# EAGLE board star-tracker-camera-board (EAGLE 9.6.2)
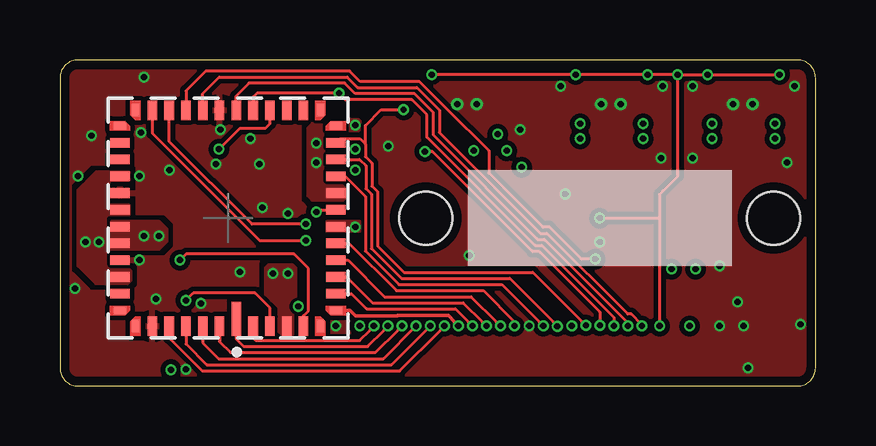
[diagram p0: board, top side]
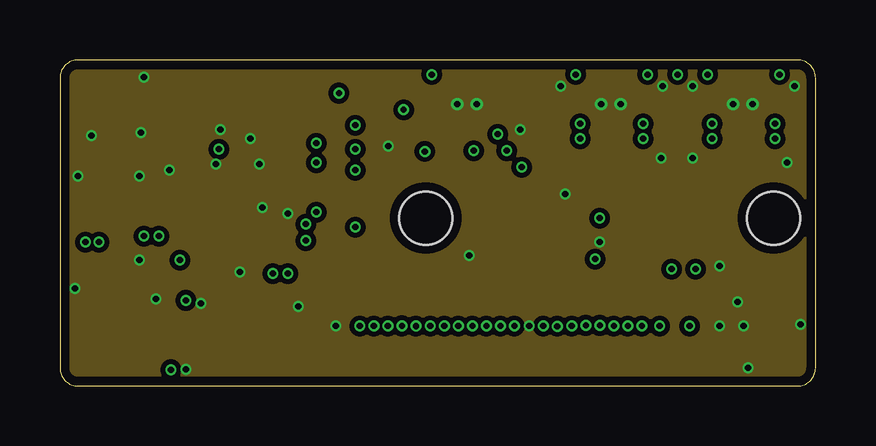
[diagram p1: board, inner layer Route2]
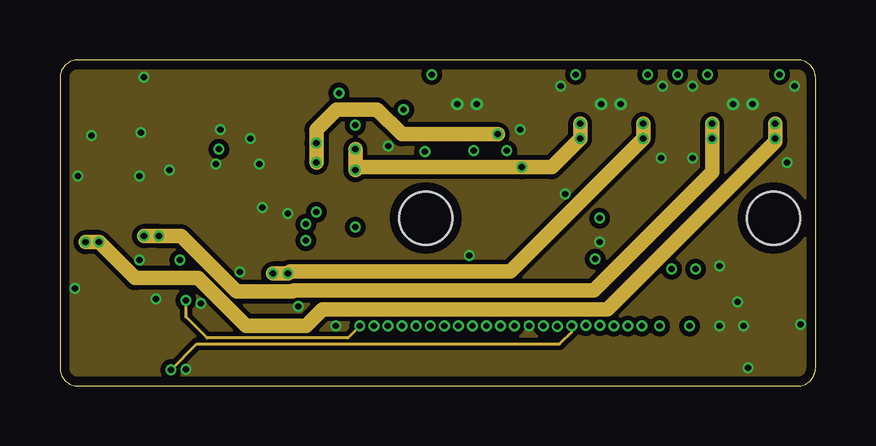
[diagram p2: board, inner layer Route15]
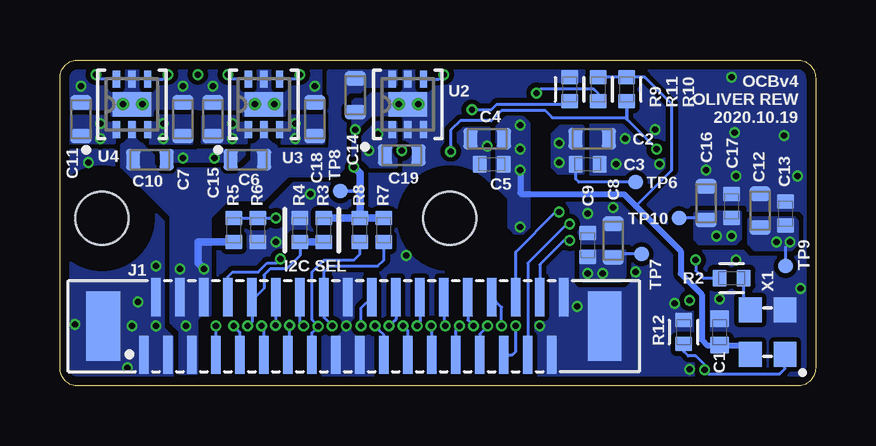
[diagram p3: board, bottom side, seen from below]

Size 31.5 x 13.6 mm. Coordinates in mm from the lower left corner, seen from the top.
Outline: 30.75,13.6 0.75,13.6 arc90 0,12.85 0,0.75 arc90 0.75,0 30.75,0 arc90 31.5,0.75 31.5,12.85 arc90 30.75,13.6
Copper layers (1*2*15*16): Top 0.035559375mm / dielectric 0.17018125mm / Route2 0.01778125mm / dielectric 47mil / Route15 0.01778125mm / dielectric 0.17018125mm / Bottom 0.035559375mm
Design rules "oshpark-4layer *": minimum track width 5mil, minimum drill 10mil, track to track 5mil, track to pad 5mil, pad to pad 5mil, via to via 5mil, smd to smd 5mil, copper to edge 15mil, drill to drill 6mil, minimum pad ring 4mil, minimum via ring 4mil, stop-mask expansion 1.5mil, vias tented up to drill 10mil, thermal gap 10mil
Holes 2.2 mm at 15.25,7 29.75,7
bRestrict: area 13.8,5.5 to 16.8,8.5; area 28.2,5.5 to 31.2,8.5

## Footprints (pad centres in the part's own frame; a part is rotated, then mirrored left to right if it is on the bottom)
.0402-A-NOSILK = smd 0.7 x 0.8: 1 -0.55,0; 2 0.55,0
.0603-C-NOSILK = smd 0.6 x 0.9: 1 -0.7,0; 2 0.7,0
.0402-B-NOSILK = smd 0.6 x 0.7: 1 -0.5,0; 2 0.5,0
TE_3-1734742-6 = smd 0.4 x 1.6: 1 -9.75,-1.2; 2 -9.25,1.2; 3 -8.75,-1.2; 4 -8.25,1.2; 5 -7.75,-1.2; 6 -7.25,1.2; 7 -6.75,-1.2; 8 -6.25,1.2; 9 -5.75,-1.2; 10 -5.25,1.2; 11 -4.75,-1.2; 12 -4.25,1.2; 13 -3.75,-1.2; 14 -3.25,1.2; 15 -2.75,-1.2; 16 -2.25,1.2; 17 -1.75,-1.2; 18 -1.25,1.2; 19 -0.75,-1.2; 20 -0.25,1.2; 21 0.25,-1.2; 22 0.75,1.2; 23 1.25,-1.2; 24 1.75,1.2; 25 2.25,-1.2; 26 2.75,1.2; 27 3.25,-1.2; 28 3.75,1.2; 29 4.25,-1.2; 30 4.75,1.2; 31 5.25,-1.2; 32 5.75,1.2; 33 6.25,-1.2; 34 6.75,1.2; 35 7.25,-1.2; 36 7.75,1.2 | smd 1.4 x 2.9: S1 -11.45,0; S2 9.45,0
.0402-B = smd 0.6 x 0.7: 1 -0.5,0; 2 0.5,0
TP06R = smd 0.6 x 0.6: TP 0,0
AR0134CSSM00SPCA0 = smd 0.4 x 1.4: 1 -0.35,4.2 | smd 0.4 x 0.8: 2 -1.05,4.5; 3 -1.75,4.5; 4 -2.45,4.5; 5 -3.15,4.5; 20 -3.15,-4.5; 21 -2.45,-4.5; 22 -1.75,-4.5; 23 -1.05,-4.5; 24 -0.35,-4.5; 25 0.35,-4.5; 26 1.05,-4.5; 27 1.75,-4.5; 28 2.45,-4.5; 29 3.15,-4.5; 44 3.15,4.5; 45 2.45,4.5; 46 1.75,4.5; 47 1.05,4.5; 48 0.35,4.5 | smd 0.3 x 0.5: 6 -3.85,4.5; 19 -3.85,-4.5; 30 3.85,-4.5; 43 3.85,4.5 | smd 0.5 x 0.3: 7 -4.5,3.85; 18 -4.5,-3.85; 31 4.5,-3.85; 42 4.5,3.85 | smd 0.8 x 0.4: 8 -4.5,3.15; 9 -4.5,2.45; 10 -4.5,1.75; 11 -4.5,1.05; 12 -4.5,0.35; 13 -4.5,-0.35; 14 -4.5,-1.05; 15 -4.5,-1.75; 16 -4.5,-2.45; 17 -4.5,-3.15; 32 4.5,-3.15; 33 4.5,-2.45; 34 4.5,-1.75; 35 4.5,-1.05; 36 4.5,-0.35; 37 4.5,0.35; 38 4.5,1.05; 39 4.5,1.75; 40 4.5,2.45; 41 4.5,3.15
DRV6_1P6X1 = smd 0.7 x 0.3: 1 -1.05,0.65; 2 -1.05,0; 3 -1.05,-0.65; 4 1.05,-0.65; 5 1.05,0; 6 1.05,0.65 | smd 1.016 x 1.6: 7 0,0 | drill 0.254 pad 0.508: 8 0,0.375; 9 0,-0.438
OSC_KYOCERA_KC2520B = smd 1.05 x 0.95: 1 -0.925,-0.725; 2 0.925,-0.725; 3 0.925,0.725; 4 -0.925,0.725

## Placement (x,y rotation side)
C1  10nF  [.0402-A-NOSILK]  4,2.25 270 bottom
C2  10uF  [.0603-C-NOSILK]  9.31,10.31 0 bottom
C3  0.1uF  [.0402-B-NOSILK]  9.5,9.25 0 bottom
C4  10uF  [.0603-C-NOSILK]  13.69,10.31 180 bottom
C5  0.1uF  [.0402-B-NOSILK]  13.5,9.25 180 bottom
C6  1.0uF  [.0603-C-NOSILK]  23.69,9.44 180 bottom
C7  2.2uF  [.0603-C-NOSILK]  26.38,11.12 90 bottom
C8  10uF  [.0603-C-NOSILK]  8.44,6.06 90 bottom
C9  0.1uF  [.0402-B-NOSILK]  9.5,5.88 90 bottom
C10  1.0uF  [.0603-C-NOSILK]  27.75,9.44 0 bottom
C11  2.2uF  [.0603-C-NOSILK]  30.62,11.12 90 bottom
C12  10uF  [.0603-C-NOSILK]  2.31,7.31 90 bottom
C13  0.1uF  [.0402-B-NOSILK]  1.25,7.19 90 bottom
C14  1.0uF  [.0603-C-NOSILK]  19.19,12.12 270 bottom
C15  2.2uF  [.0603-C-NOSILK]  25.12,11.12 90 bottom
C16  10uF  [.0603-C-NOSILK]  4.56,7.62 90 bottom
C17  0.1uF  [.0402-B-NOSILK]  3.5,7.5 90 bottom
C18  2.2uF  [.0603-C-NOSILK]  20.88,11.12 90 bottom
C19  2.2uF  [.0603-C-NOSILK]  17.25,9.62 0 bottom
J1  3-1734742-6  [TE_3-1734742-6]  18.25,2.5 0 bottom
R2  100  [.0402-B]  3.5,4.5 180 bottom
R3  DNP  [.0402-B-NOSILK]  20.5,6.5 90 bottom
R4  10k  [.0402-B-NOSILK]  21.5,6.5 270 bottom
R5  10k  [.0402-B-NOSILK]  24.25,6.5 90 bottom
R6  DNP  [.0402-B-NOSILK]  23.25,6.5 270 bottom
R7  4.7k  [.0402-B-NOSILK]  18,6.5 90 bottom
R8  4.7k  [.0402-B-NOSILK]  19,6.5 90 bottom
R9  10k  [.0402-B]  10.25,12.38 270 bottom
R10  10k  [.0402-B]  7.88,12.38 90 bottom
R11  10k  [.0402-B]  9.06,12.38 90 bottom
R12  10k  [.0402-B]  5.5,2.25 270 bottom
TP6  TPTP06R  [TP06R]  7.5,8.5 0 bottom
TP7  TPTP06R  [TP06R]  7.25,5.5 0 bottom
TP8  TPTP06R  [TP06R]  19.81,8.12 0 bottom
TP9  TPTP06R  [TP06R]  1.25,5 0 bottom
TP10  TPTP06R  [TP06R]  5.69,7 0 bottom
U1  AR0134CSSM00SPCA0  [AR0134CSSM00SPCA0]  7,7 180 top
U2  TPS70618DRVR  [DRV6_1P6X1]  17,11.75 90 bottom
U3  TPS71928-28DRVT  [DRV6_1P6X1]  23,11.75 90 bottom
U4  TPS71928-28DRVT  [DRV6_1P6X1]  28.5,11.75 90 bottom
X1  KC2520B27.0000C10E00  [OSC_KYOCERA_KC2520B]  2,2.25 90 bottom

## Library data of the parts
C1-C19 R2-R12 = oresat-rcl
J1 = J-TEConnectivity-3-1734742-6 ; DPN: A100241CT-ND; MPN: 3-1734742-6
TP6-TP10 = J-TestPoint-Small
U1 = U-ONSemi-AR0134
U2 = U-TI-TPS70618-VoltageReg; DPN: 296-48768-1-ND; MPN: TPS70618DRVR; VENDOR: Texas Instruments
U3 U4 = U-TI-TPS71928-28-VoltageReg; DPN: 296-21660-1-ND; MPN: TPS71928-28DRVR; VENDOR: Texas Instruments
X1 = X-KYOCERA-KC2520B27; DPN: 478-4781-1-ND; MPN: KC2520B27.0000C10E00; VENDOR: Kyocera

## Nets
3.3V: C6.1 C10.1 C14.1 J1.4 J1.5 J1.6 R5.1 U2.6 U3.2 U4.2
!OE: J1.11 R11.1 U1.23
!RESET: J1.13 R9.2 U1.17
CLK_EN: J1.14 R12.2 X1.1
D0: J1.25 U1.45
D1: J1.26 U1.46
D2: J1.27 U1.47
D3: J1.28 U1.48
D4: J1.29 U1.1
D5: J1.30 U1.2
D6: J1.31 U1.3
D7: J1.24 U1.7
D8: J1.23 U1.8
D9: J1.22 U1.9
D10: J1.21 U1.10
D11: J1.20 U1.11
FLASH: J1.9 U1.26
GND: C1.1 C2.2 C3.2 C4.2 C5.2 C6.2 C7.2 C8.2 C9.2 C10.2 C11.2 C12.2 C13.2 C14.2 C15.2 C16.2 C17.2 C18.2 C19.2 J1.1 J1.2 J1.3 J1.17 J1.18 J1.19 J1.35 J1.36 J1.S1 J1.S2 R4.1 R6.2 R9.1 R12.1 U1.6 U1.25 U1.30 U1.35 U1.39 U1.44 U2.2 U2.3 U2.5 U2.7 U2.8 U2.9 U3.5 U3.7 U3.8 U3.9 U4.5 U4.7 U4.8 U4.9 X1.2
HSYNC: J1.34 U1.29
N$1: R2.1 X1.3
N$2: R2.2 U1.5
PIXCLK: J1.32 U1.13
SADDR: J1.10 R3.1 R4.2 U1.24
SCLK: J1.16 R7.1 U1.15
SDATA: J1.15 R8.1 U1.16
STANDBY: J1.12 R10.1 U1.22
TRIGGER: J1.8 U1.27
VAA: C11.1 C12.1 C13.1 TP9.TP U1.34 U1.36 U1.40 U4.1
VAA_PIX: C7.1 C16.1 C17.1 TP10.TP U1.37 U1.38 U4.3
VDD: C2.1 C3.1 C19.1 TP6.TP U1.14 U1.19 U2.1
VDD_IO: C1.2 C4.1 C5.1 C18.1 R3.2 R7.2 R8.2 R10.2 R11.2 TP8.TP U1.12 U1.18 U3.3 X1.4
VDD_PLL: C8.1 C9.1 C15.1 TP7.TP U1.4 U3.1
VREG_EN: J1.7 R5.2 R6.1 U2.4 U3.4 U3.6 U4.4 U4.6
VSYNC: J1.33 U1.28

## Tracks (layer width: path | path; a pad name or v marks a point on that pad's centre or on a via)
3.3V  (via drill 0.25)
  Bottom 0.305: R5.1 25.75,6 25.75,5.12 v25.5,4.88
  other vias: 26.25,2.5 26.5,4.88
  pour Bottom (rank 2, no thermals): 28.94,10.06 28.94,9.31 28.06,9.31 28.06,10.06 28.12,10.06 28.38,10.31 28.38,11 28.62,11 28.62,10.31 28.88,10.06
  pour Bottom (rank 2, no thermals): 23.44,10.06 23.44,9.31 22.56,9.31 22.56,10.06 22.62,10.06 22.88,10.31 22.88,11 23.12,11 23.12,10.31 23.38,10.06
  pour Bottom (no thermals): 25.25,4.5 25.25,2.94 25.62,2.94 25.75,2.81 25.81,2.75 25.81,2.06 25.81,0.5 26.5,0.5 26.5,2.25 26.75,2.5 26.88,2.62 26.88,3.44 26.88,5.25 26.5,5.25 25.25,5.25
  pour Bottom (rank 3, no thermals): 26.88,5.25 26.88,7.06 28.94,9.12 28.94,10.06 28.06,10.06 27.62,9.62 27.62,9.25 27.44,9.06 23.88,9.06 23.5,9.44 23.5,10.06 22.56,10.06 22.44,9.94 20.44,9.94 20.31,10.06 20.31,13.12 20.19,13.25 18.81,13.25 18.69,13.12 18.69,12.56 19,12.25 19.44,12.25 19.62,12.06 19.62,9.12 20,8.75 22,8.75 23,7.75 24.5,7.75 25.25,7 25.25,5.25
  pour Bottom (no thermals): 17.56,12.5 19.62,12.5 19.69,12.56 19.69,13.12 19.56,13.25 17.56,13.25 17.5,13.19 17.5,12.56
!OE  (via drill 0.25)
  Top 0.127: v23.09,2.5 23.09,2.86 20.09,5.86 19.81,5.86 15.29,10.38 15.29,11.32 14.67,11.94 11.9,11.94 v11.63,12.21 8.21,12.21 8.05,12.05 U1.23
  Bottom 0.127: J1.11 23,2.41 v23.09,2.5 | R11.1 9.06,12.19 9.25,12.38 11.47,12.38 v11.63,12.21
!RESET  (via drill 0.25)
  Top 0.127: U1.17 11.66,10.31 12.5,10.31 12.73,10.08 | 12.73,10.08 12.73,9.56 13,9.29 13,8.34 13.24,8.1 13.24,5.84 14.34,4.74 19.71,4.74 21.75,2.7 21.75,2.69 v21.92,2.53 | 12.73,10.08 12.73,10.87 13.39,11.52 v14.33,11.52
  Bottom 0.127: J1.13 21.92,1.38 v21.92,2.53 | v14.33,11.52 13.52,11.52 13.29,11.75 10.38,11.75 R9.2
CLK_EN  (via drill 0.25)
  Route15 0.127: v4.62,0.67 5.7,1.75 20.83,1.75 21.34,2.25 v21.34,2.5
  Bottom 0.127: X1.1 1.27,0.72 1.49,0.51 4.46,0.51 v4.62,0.67 4.62,0.88 5,1.25 5.31,1.25 5.5,1.44 R12.2 | v21.34,2.5 21.5,2.67 J1.14
D0  (via drill 0.25)
  Top 0.127: U1.45 4.55,2.01 5.93,0.63 14.16,0.63 15.86,2.33 v16.02,2.5
  Bottom 0.127: J1.25 16,2.48 v16.02,2.5
D1  (via drill 0.25)
  Top 0.127: U1.46 5.25,1.75 6.12,0.88 13.82,0.88 v15.44,2.5
  Bottom 0.127: J1.26 15.5,2.56 v15.44,2.5
D2  (via drill 0.25)
  Top 0.127: U1.47 5.95,1.8 6.61,1.14 13.48,1.14 v14.84,2.5
  Bottom 0.127: J1.27 15,2.34 v14.84,2.5
D3  (via drill 0.25)
  Top 0.127: U1.48 6.65,1.85 7.11,1.39 13.15,1.39 14.09,2.33 14.09,2.34 v14.26,2.51
  Bottom 0.127: J1.28 14.5,2.75 v14.26,2.51
D4  (via drill 0.25)
  Top 0.127: U1.1 7.35,1.96 7.67,1.65 12.82,1.65 13.5,2.33 v13.67,2.5
  Bottom 0.127: v13.67,2.5 14,2.17 J1.29
D5  (via drill 0.25)
  Top 0.127: U1.2 8.05,2.01 8.16,1.9 12.49,1.9 12.92,2.33 v13.08,2.5
  Bottom 0.127: v13.08,2.5 13.08,3.28 J1.30
D6  (via drill 0.25)
  Top 0.127: U1.3 8.75,3.25 8.12,3.88 5.56,3.88 v5.25,3.57
  Route15 0.127: v12.5,2.5 12,2 6.13,2 5.25,2.88 v5.25,3.57
  Bottom 0.127: J1.31 12.64,1.3 12.5,1.44 v12.5,2.5
D7  (via drill 0.25)
  Top 0.152: U1.7 12.1,3.15 12.32,2.93 14.07,2.93 14.08,2.94 16.2,2.94 16.45,2.68 16.45,2.65 v16.61,2.5
  Bottom 0.127: J1.24 16.5,2.61 v16.61,2.5
D8  (via drill 0.25)
  Top 0.127: U1.8 12.15,3.85 12.78,3.22 16.48,3.22 17.02,2.67 v17.19,2.5
  Bottom 0.127: J1.23 17,2.3 17.02,2.33 v17.19,2.5
D9  (via drill 0.25)
  Top 0.127: U1.9 11.95,4.55 13.03,3.47 16.81,3.47 17.61,2.67 v17.77,2.5
  Bottom 0.127: J1.22 17.5,2.78 17.61,2.67 v17.77,2.5
D10  (via drill 0.25)
  Top 0.127: U1.10 12,5.25 13.53,3.72 17.14,3.72 18.19,2.67 v18.36,2.5
  Bottom 0.127: J1.21 18,2.13 18.19,2.33 v18.36,2.5
D11  (via drill 0.25)
  Top 0.127: U1.11 12.05,5.95 14.02,3.98 17.65,3.98 18.94,2.68 v18.94,2.5
  Bottom 0.127: v18.94,2.5 18.94,3.26 J1.20
FLASH  (via drill 0.25)
  Top 0.127: U1.26 5.95,12.2 6.64,12.89 11.97,12.89 12.41,12.45 14.88,12.45 15.82,11.51 15.82,10.57 20.02,6.37 20.3,6.37 23.67,3 23.81,3 24.26,2.56 v24.26,2.5
  Bottom 0.127: J1.9 24,2.24 24.09,2.33 v24.26,2.5
GND  (via drill 0.25)
  other vias: 3.38,10.56 11.5,2.5 4,3.62 3.31,5.25 1.31,10.44 3.31,8.75 6.69,10.69 4.56,9 8.44,7.44 9.5,7.19 8.31,9.25 7.94,10.31 0.75,8.75 19.19,10.69 20.88,12.5 25.12,12.5 26.38,12.5 30.62,12.5 26.38,9.5 25.06,9.5 0.62,4.06 19.56,2.5 13.69,10 21.06,8 27.5,2.5 28.25,3.5 27.5,5 28.5,2.5 30.88,2.56 28.69,0.75 22.5,6 7.5,4.75 9.94,3.31 17.06,5.44 6.5,9.25 3.5,12.88 30.31,9.31 5.88,3.44 5.25,0.69
  pour Top (isolate 0.2, rank 3): -0.25,-0.25 31.75,-0.25 31.75,14 -0.25,14
  pour Route2 (isolate 0.2): -1,-1 32.5,-1 32.5,14.75 -1,14.75
  pour Route15 (isolate 0.2, rank 3): -0.75,-0.75 32.25,-0.75 32.25,14.5 -0.75,14.5
  pour Bottom (isolate 0.2, rank 4, no thermals): -0.5,-0.5 32,-0.5 32,14.25 -0.5,14.25
HSYNC  (via drill 0.25)
  Top 0.127: U1.29 3.85,10.54 8.33,6.06 v10.25,6.06
  Bottom 0.127: J1.34 11.5,5.06 10.5,6.06 v10.25,6.06
N$1
  Bottom 0.127: X1.3 3,3.45 R2.1
N$2  (via drill 0.25)
  Top 0.127: U1.5 10.15,2.93 10.36,3.14 10.36,4.89 9.75,5.5 5.25,5.5 v5,5.25
  Bottom 0.127: v5,5.25 5,4.81 4.69,4.5 R2.2
N$3  (via drill 0.25)
  other vias: 17.25,9.81
PIXCLK  (via drill 0.25)
  Top 0.127: v10.69,7.25 10.79,7.35 U1.13
  Bottom 0.127: J1.32 12.5,5.59 10.84,7.25 v10.69,7.25
SADDR  (via drill 0.25)
  Top 0.127: U1.24 7.35,12.1 7.88,12.63 11.87,12.63 12.3,12.2 14.77,12.2 15.56,11.4 15.56,10.47 19.92,6.12 20.2,6.12 23.67,2.64 v23.67,2.5
  Bottom 0.127: J1.10 23.5,3.56 | 23.5,3.56 23.5,2.68 23.51,2.67 v23.67,2.5 | R4.2 21.5,5.44 22.06,4.88 22.75,4.88 23,4.62 23,4.06 23.5,3.56
  Bottom 0.305: R3.1 R4.2
SCLK  (via drill 0.25)
  Top 0.127: U1.15 11.88,8.75 12.73,7.89 12.73,5.63 14.13,4.23 18.42,4.23 19.98,2.67 v20.15,2.5
  Bottom 0.127: v20.15,2.5 20.5,2.85 J1.16 20.5,4.75 20.25,5 18.25,5 18,5.25 R7.1
SDATA  (via drill 0.25)
  Top 0.127: U1.16 12.49,9.45 12.75,9.19 12.75,8.23 12.99,8 12.99,5.73 14.23,4.49 18.75,4.49 20.57,2.67 20.57,2.66 v20.73,2.49
  Bottom 0.127: J1.15 21,2.22 v20.73,2.49 21,2.76 21,4.75 20.5,5.25 19.25,5.25 19,5.5 R8.1
STANDBY  (via drill 0.25)
  Top 0.127: v22.5,2.53 22.5,3.09 19.99,5.61 19.71,5.61 15.53,9.79 v15.21,9.79 | U1.22 8.75,10.94 8.56,10.75 7.5,10.75 v6.62,9.88
  Bottom 0.127: J1.12 v22.5,2.53 | v6.62,9.88 7.88,11.12 R10.1 7.88,11.25 7.93,11.19 10.97,11.19 11.26,11.48 13.1,11.48 13.52,11.06 14.81,11.06 15.21,10.67 v15.21,9.79
TRIGGER  (via drill 0.25)
  Top 0.127: U1.27 5.25,12.31 6.08,13.14 12.08,13.14 12.52,12.7 14.98,12.7 16.12,11.57 17.88,9.81 17.88,8.88 20.13,6.62 20.41,6.62 21.73,5.29 v22.31,5.29
  Bottom 0.127: J1.8 24.5,4.56 24.31,4.75 23.23,4.75 22.86,5.13 22.48,5.13 v22.31,5.29
VAA  (via drill 0.25)
  Route15 0.61: v1.06,6 v1.62,6 3.12,4.5 5.75,4.5 7.75,2.5 10.25,2.5 10.94,3.19 22.81,3.19 29.81,10.19 v29.81,10.31 v29.81,10.94
  Bottom 0.127: TP9.TP 1.25,5.81 v1.06,6
  pour Bottom (no thermals): 29.06,10.41 29.25,10.41 29.25,10.12 31.06,10.12 31.06,11.25 29.66,11.25 29.66,10.97 29.06,10.97
  pour Bottom (no thermals): 1.06,7 2.75,7 2.81,6.94 2.81,5.94 2.62,5.75 2.56,5.69 1.25,5.69 1,5.69 0.75,5.94 0.75,6.88 0.88,7
  pour Top (no thermals): 2.88,7.56 2.88,7.12 2,7.12 1.88,7 1.88,5.06 2.06,4.88 2.88,4.88 2.94,4.81 2.94,4.38 2.81,4.25 1.5,4.25 0.75,5 0.75,7.25 1.06,7.56
  pour Top (no thermals): 2.88,8.56 2.12,8.56 1.94,8.38 1.94,7.12 0.75,7.12 0.75,8.19 1.5,8.94 2.88,8.94
VAA_PIX  (via drill 0.25)
  Route15 0.61: v3.5,6.25 v4.12,6.25 5.04,6.25 7.36,3.94 9.7,3.94 9.75,3.99 22.26,3.99 27.19,8.92 v27.19,10.31 v27.19,10.94
  Bottom 0.127: C16.1 4.64,7 TP10.TP
  pour Bottom (no thermals): 27.94,10.41 27.75,10.41 27.75,10.12 26,10.12 26,11.25 27.34,11.25 27.34,10.97 27.94,10.97
  pour Bottom (no thermals): 3.56,7.25 5,7.25 5.06,7.19 5.06,6.12 4.94,6 4.88,5.94 3.5,5.94 3.31,5.94 3.19,6.06 3.12,6.12 3.12,7.06 3.12,7.25
  pour Top (rank 2, no thermals): 2.06,6.88 4.12,6.88 4.44,6.56 4.44,6 4.12,5.69 2.06,5.69
VDD  (via drill 0.25)
  Route15 0.61: v18.25,10.5 14.25,10.5 13.21,11.54 11.54,11.54 10.69,10.69 v10.69,10.12 v10.69,9.31
  Bottom 0.127: TP6.TP 9.88,8.5 10,8.62 C3.1
  other vias: 18.62,9.81
  pour Top (no thermals): 10.75,11.94 10.69,11.94 10.62,11.88 10.5,11.75 10.5,11.44 10.5,10.94 10.38,10.81 10.31,10.75 10.31,10.19 10.31,7.94 10.5,7.75 11.81,7.75 11.88,7.81 11.88,8.19 11.88,8.25 11.81,8.31 11.75,8.38 11.25,8.38 11.12,8.38 11,8.5 11,11 11.12,11.12 11.12,11.75 11.12,11.88 11.06,11.94
  pour Bottom (no thermals): 9.75,10.81 10.69,10.81 10.88,10.62 11,10.5 11,10.12 11,9.12 10.75,8.88 10.06,8.88 9.69,8.88 9.69,10.81
  pour Bottom (no thermals): 17.5,11 17.5,9.12 18.56,9.12 18.88,9.44 18.88,10.44 18.31,11
VDD_IO  (via drill 0.25)
  Route15 0.61: v12.31,9.88 v12.31,9 12.44,9.12 v19.25,9.12 20.5,9.12 v21.69,10.31 v21.69,10.94
  Bottom 0.127: 7.5,7.5 6,9 6,11.75 7.12,12.88 R10.2 R11.2
  Bottom 0.152: TP8.TP 19,8.12
  Bottom 0.254: v12.31,9 12.31,8.06 12.25,8 8,8 7.5,7.5 5.62,5.62 5.62,4.69 4.75,3.81 4.75,1.94 4.51,1.7 C1.2 3.1,1.7 X1.4
  Bottom 0.305: R7.2 R8.2 | R8.2 R3.2 | R8.2 19,8.12 19,8.88 v19.25,9.12
  other vias: 12.31,10.88 12.31,6.62
  pour Bottom (no thermals): 22.44,10.41 22.25,10.41 22.25,10.12 20.5,10.12 20.5,11.25 21.84,11.25 21.84,10.97 22.44,10.97
  pour Bottom (no thermals): 12.31,11.19 12.94,11.19 13.12,11 13.31,10.81 13.31,9.5 13.31,8.31 13.19,8.19 12.81,7.81 12.81,7 12.81,6.62 12.56,6.38 12.19,6.38 12.06,6.5 11.94,6.62 11.94,9.62 11.94,10.94 12.19,11.19
  pour Top (rank 2, no thermals): 11.19,10.88 11.44,11.12 12.44,11.12 12.56,11 12.56,10.75 12.44,10.62 11.19,10.62
  pour Top (no thermals): 11.12,6.88 12.5,6.88 12.56,6.81 12.56,6.56 12.56,6.5 12.5,6.44 11.12,6.44
VDD_PLL  (via drill 0.25)
  Route15 0.61: v8.88,4.69 v9.5,4.69 9.59,4.77 18.77,4.77 v24.31,10.31 | v24.31,10.94 v24.31,10.31 | v24.31,10.31
  Bottom 0.127: TP7.TP 8.3,5.5 C8.1
  pour Bottom (no thermals): 23.56,10.41 23.75,10.41 23.75,10.12 25.56,10.12 25.56,11.25 24.16,11.25 24.16,10.97 23.56,10.97
  pour Bottom (no thermals): 9.81,5.62 9.81,4.5 9.75,4.44 9.69,4.38 8.5,4.38 8.12,4.38 7.94,4.56 7.94,5.62
  pour Top (no thermals): 9.44,5.06 9.69,5.06 9.81,4.94 9.81,3.69 9.69,3.56 9.69,2.12 9.25,2.12 9.12,2.25 9.12,2.31 9.12,3.25 8.81,3.56 8.56,3.81 8.56,4.44 8.56,4.94 8.69,5.06
VREG_EN  (via drill 0.25)
  Top 0.127: v25,2.5 25,7 | 25,7 25,8 25.75,8.75 v25.75,12.99 | v25.75,12.99 v27,12.99 v30,12.99 | v25.75,12.99 v24.5,12.99 v21.5,12.99 v15.5,12.99 | v22.5,7 25,7
  Bottom 0.127: R5.2 R6.1 v22.5,7 | J1.7 v25,2.5 | U4.4 27.19,12.8 v27,12.99 | U4.6 29.81,12.8 v30,12.99 | U3.6 24.31,12.8 v24.5,12.99 | v21.5,12.99 21.69,12.8 U3.4 | U2.4 15.69,12.8 v15.5,12.99
VSYNC  (via drill 0.25)
  Top 0.127: v10.25,6.75 8,6.75 4.55,10.2 U1.28
  Bottom 0.127: v10.25,6.75 10.38,6.75 12,5.12 J1.33

## Text on the board
bPlace: OCBv4 / OLIVER REW / 2020.10.19 | I2C SEL
Document: Holes are 2.4mm for M2 through hole | OCBv2 == Oresat Camera Board v2 | M2 screws / 2.2mm through hole / 4mm head clearance / MC: 91292A004 | MAKE SURE FFC CONNECTOR IS / CORRECT ORIENTATION! CONTACTS / MUST BE ON TOP OF CONNECTOR TO / MATE WITH OCTAVO CARD. MEASURE / TWICE CUT ONCE!!!!